# Altium PCB nguon-usb.pcbdoc
Units mm, origin at the board's own origin, x right, y up, seen from the top; angles counter-clockwise.
Board outline 78.61 x 100 mm, 2 copper layers (Top Layer, Bottom Layer); 10 components, 3 nets, 180 pads, 0 vias.
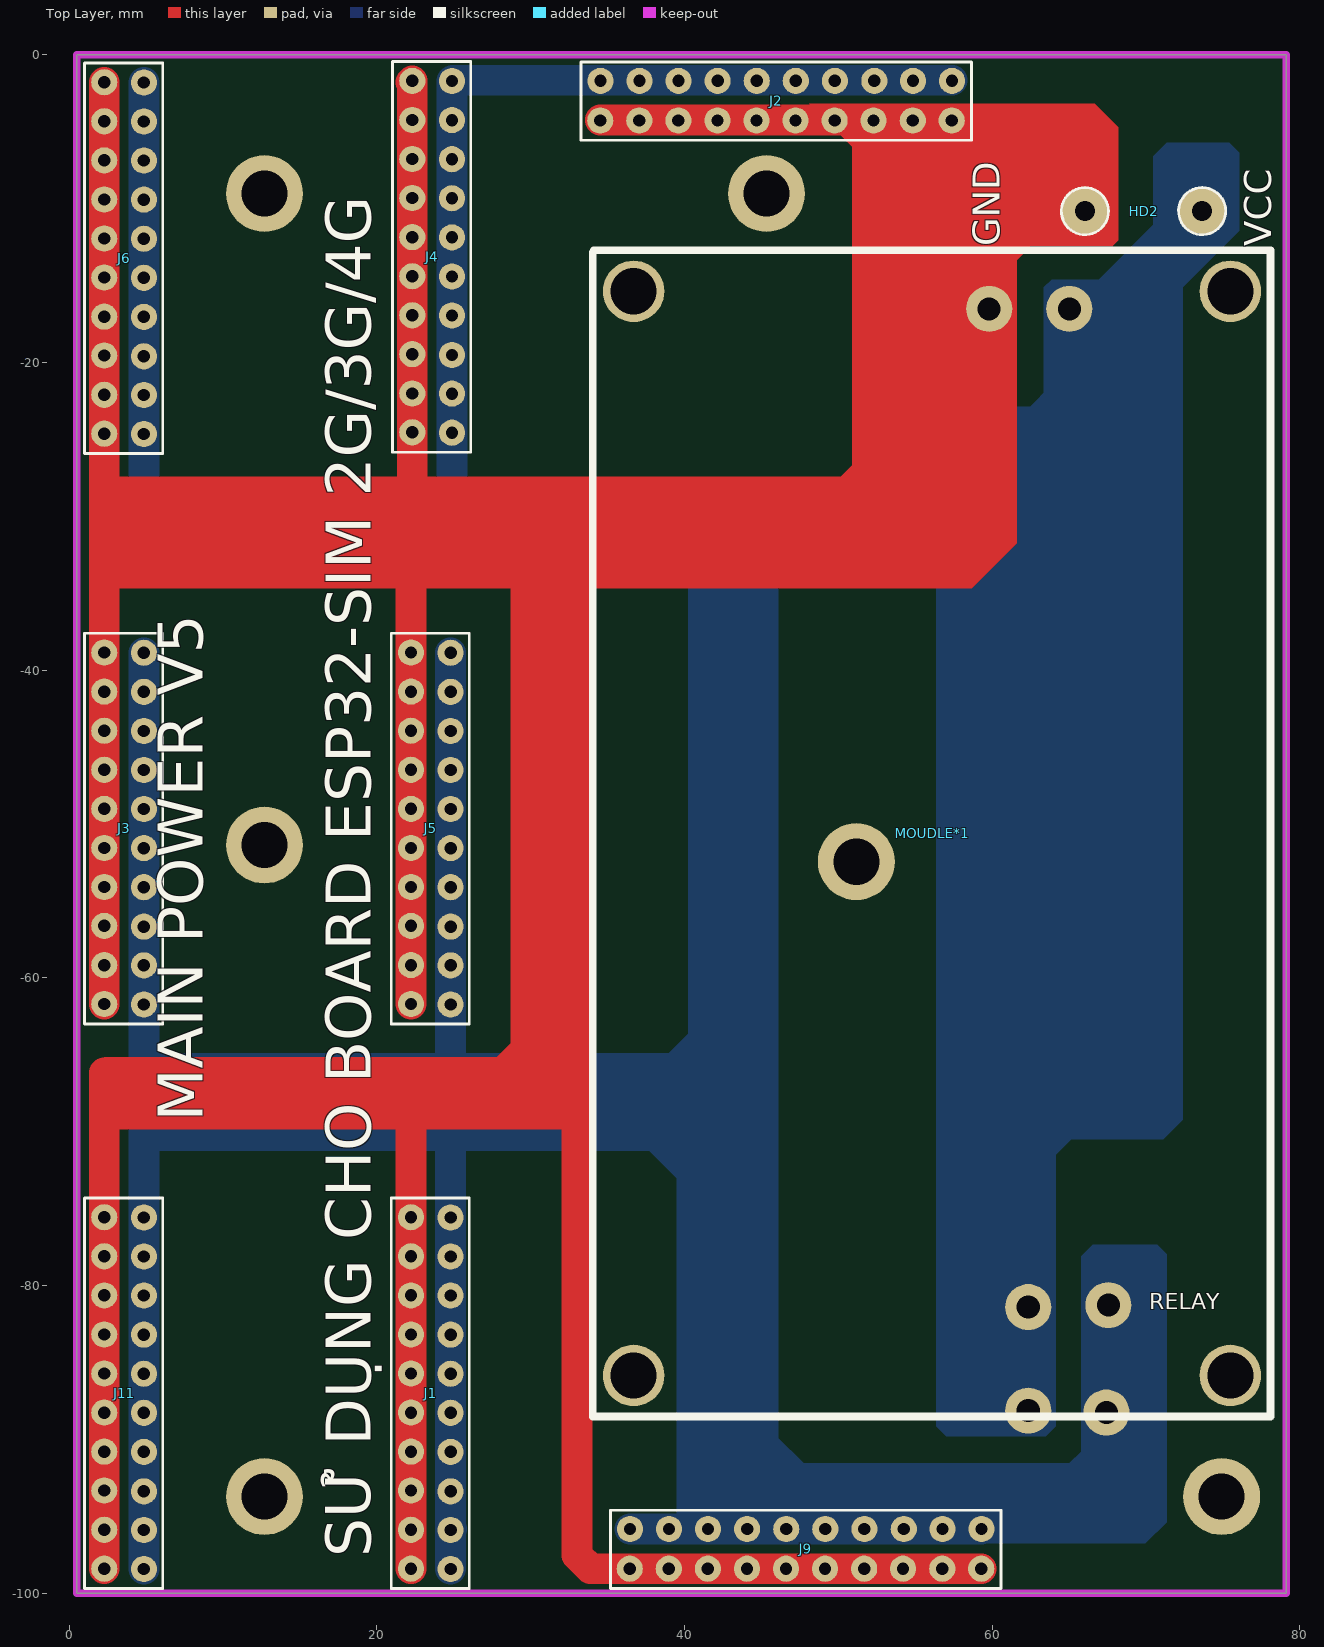
[diagram p0: Top Layer view]
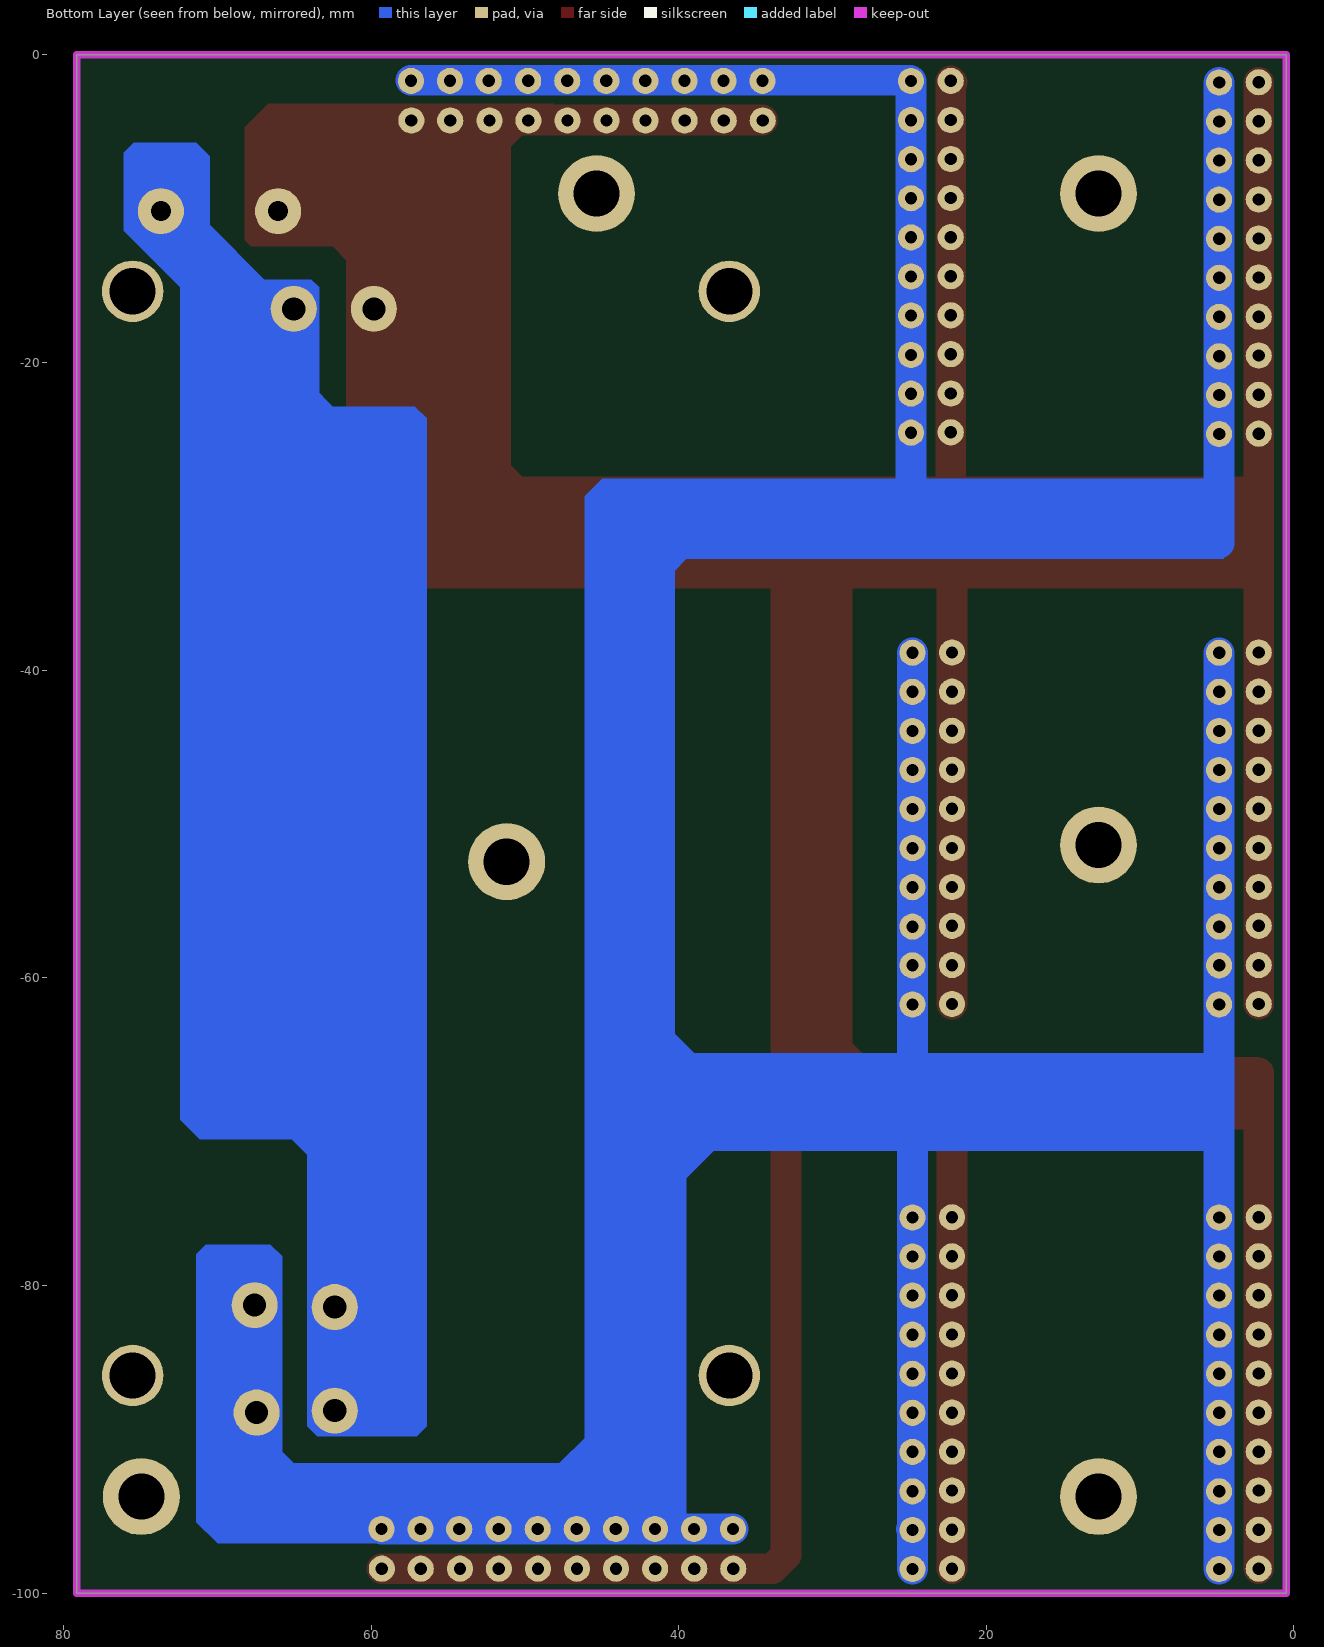
[diagram p1: Bottom Layer view, seen from below]

## Layer stack, top to bottom
Top Solder: solder mask 0.0102, Solder Resist, Dk 3.5
Top Layer: signal copper 0.0356
Dielectric 1: dielectric 0.32, FR-4, Dk 4.8
Bottom Layer: signal copper 0.0356
Bottom Solder: solder mask 0.0102, Solder Resist, Dk 3.5

## Board outline
0.508,-100 0.508,0 79.121,0 79.121,-100

## Design rules (kind name [scope] priority, off if disabled: settings)
Clearance [All] p1: gap=0.254 ignorepadtopadclearanceinfootprint=FALSE except(0: Arc-Hole Track-Hole SMDPad-Hole THPad-Hole Via-Hole Fill-Hole Poly-Hole Region-Hole Text-Hole)
PolygonConnect [All] p1: connectstyle=Relief reliefconductorwidth=0.254 reliefentries=4 polygonreliefangle="90 Angle" airgapwidth=0.254
RoutingVias [All] p1: holewidth=0.711 width=1.27 viastyle="Through Hole" minholewidth=0.711 minwidth=1.27 maxholewidth=0.711 maxwidth=1.27
SolderMaskExpansion [All] p1: expansion=0.102
Width [All] p1: maxlimit=4.5 minlimit=0.2 preferedwidth=2
30 further rules are at their usual default settings.

## Components (designator, comment, footprint, x,y, rotation, side; value= is the part's Value field where it differs from the comment)
HD2 "Header 2" "HED2 -C" 66.04,-10.16 r0 top
J1 "JP10x2" "JP10X2 - DUPLICATE" 24.765,-98.425 r90 top
J2 "JP10x2" "JP10X2 - DUPLICATE" 57.391,-1.727 r180 top
J3 "JP10x2" "JP10X2 - DUPLICATE" 4.826,-61.716 r90 top
J4 "JP10x2" "JP10X2 - DUPLICATE" 24.854,-24.549 r90 top
J5 "JP10x2" "JP10X2 - DUPLICATE" 24.765,-61.716 r90 top
J6 "JP10x2" "JP10X2 - DUPLICATE" 4.826,-24.638 r90 top
J9 "JP10x2" "JP10X2 - DUPLICATE" 59.309,-95.872 r180 top
J11 "JP10x2" "JP10X2 - DUPLICATE" 4.826,-98.425 r90 top
MOUDLE*1 "MODULE TIMER/RELAY" "MODULE TIMER/RELAY" 65.024,-16.51 r270 top

## Footprints (in the part's own frame and the unit in brackets; to place one, negate y for a bottom-side part, rotate by r counter-clockwise, add the part's x,y. Pads: shape width x height; smd on the part's side, far side on the other; paste and mask are expansions set on the pad)
"HED2 -C" [mm] "Header 2, 2 pin, hight 300mil, Pin to Pin 200, Colour Green"
  round 3 hole 1.3: 1(0,0) 2(7.62,0)
  silkscreen extent -1.53,-1.53 9.15,1.53, body extent -3.86,-1.63 11.38,10.37, height 12.4
"JP10X2 - DUPLICATE" [mm]
  round 1.7 hole 0.8: 1(-0.013,-0.038) 2(0.013,2.54) 3(2.527,-0.038) 4(2.54,2.54) 5(5.042,-0.038) 6(5.093,2.54) 7(7.607,-0.038) 8(7.62,2.54) 9(10.147,-0.038) 10(10.16,2.54) 11(12.687,-0.038) 12(12.7,2.54) 13(15.227,-0.038) 14(15.24,2.54) 15(17.767,-0.038) 16(17.78,2.54) 17(20.307,-0.038) 18(20.32,2.54) 19(22.847,-0.038) 20(22.86,2.54)
  silkscreen extent -1.28,-1.26 24.12,3.82
"MODULE TIMER/RELAY" [mm]
  round 4 hole 3: 0(-1.143,10.473) 0(-1.143,-28.321) 0(69.342,-28.321) 0(69.342,10.473)
  round 3 hole 1.5: COM(64.897,-2.667) GND(0,-5.207) IN+(0,0) NC(64.77,2.54)
  silkscreen extent -3.81,-30.99 72.01,13.08

## Part data
HD2: library part Hed2, "Header 2 (Green)"

## Free pads (board coordinates)
  round 1 on Top Solder: 3(64.364,-75.811) 4(64.287,-75.735)
  round 5 hole 3: 8(12.7,-93.726) 8(12.7,-51.371) 8(12.7,-9.017) 8(45.339,-9.017) 8(51.181,-52.451) 8(74.93,-93.726)
  round 3 hole 1.5: 9(62.357,-88.138) 9(67.437,-88.265)

## Nets (pads, with @x,y where several pads share a name; then routed paths per layer and width w, separated by ;. In a path a pad name is that pad's centre, name@x,y a point inside that pad or via, vN(x,y) a via of type N, cw(c..) or ccw(c..) an arc to the next point about the centre after c; other vN are vias at no path point)
6.5V: J1.1 J1.3 J1.5 J1.7 J1.9 J1.11 J1.13 J1.15 J1.17 J1.19 J2.1 J2.3 J2.5 J2.7 J2.9 J2.11 J2.13 J2.15 J2.17 J2.19 J3.1 J3.3 J3.5 J3.7 J3.9 J3.11 J3.13 J3.15 J3.17 J3.19 J4.1 J4.3 J4.5 J4.7 J4.9 J4.11 J4.13 J4.15 J4.17 J4.19 J5.1 J5.3 J5.5 J5.7 J5.9 J5.11 J5.13 J5.15 J5.17 J5.19 J6.1 J6.3 J6.5 J6.7 J6.9 J6.11 J6.13 J6.15 J6.17 J6.19 J9.1 J9.3 J9.5 J9.7 J9.9 J9.11 J9.13 J9.15 J9.17 J9.19 J11.1 J11.3 J11.5 J11.7 J11.9 J11.11 J11.13 J11.15 J11.17 J11.19 MOUDLE*1.NC pad.9@67.437,-88.265 | length 231.1
  Bottom Layer w2: J11.1 J11.3 J11.5 J11.7 J11.9 J11.11 J11.13 J11.15 J11.17 J11.19 J3.1 J3.3 J3.5 J3.7 J3.9 J3.11 J3.13 J3.15 J3.17 J3.19 ; 4.864,-31.75 J6.1 J6.3 J6.5 J6.7 J6.9 J6.11 J6.13 J6.15 J6.17 J6.19 ; J1.1 J1.3 ; J5.19 J5.17 J5.15 J5.13 J5.11 J5.9 J5.7 J5.5 J5.3 J5.1 J1.19 J1.17 J1.15 J1.13 J1.11 J1.9 J1.7 J1.5 J1.3 ; J1.3@24.867,-95.834 J1.3 ; 24.892,-28.194 J4.1 J4.3 J4.5 J4.7 J4.9 J4.11 J4.13 J4.15 J4.17 J4.19 24.943,-1.651 37.973,-1.651 40.513,-1.651 42.164,-1.651 45.593,-1.651 47.244,-1.651 53.238,-1.651 J2.1@57.404,-1.651 ; J9.19 J9.17 J9.15 J9.13 J9.11 J9.9 J9.7 J9.5 J9.3 J9.1
GND: HD2.1 J1.2 J1.4 J1.6 J1.8 J1.10 J1.12 J1.14 J1.16 J1.18 J1.20 J2.2 J2.4 J2.6 J2.8 J2.10 J2.12 J2.14 J2.16 J2.18 J2.20 J3.2 J3.4 J3.6 J3.8 J3.10 J3.12 J3.14 J3.16 J3.18 J3.20 J4.2 J4.4 J4.6 J4.8 J4.10 J4.12 J4.14 J4.16 J4.18 J4.20 J5.2 J5.4 J5.6 J5.8 J5.10 J5.12 J5.14 J5.16 J5.18 J5.20 J6.2 J6.4 J6.6 J6.8 J6.10 J6.12 J6.14 J6.16 J6.18 J6.20 J9.2 J9.4 J9.6 J9.8 J9.10 J9.12 J9.14 J9.16 J9.18 J9.20 J11.2 J11.4 J11.6 J11.8 J11.10 J11.12 J11.14 J11.16 J11.18 J11.20 MOUDLE*1.GND | length 295.2
  Top Layer w2: J11.2 J11.4 J11.6 J11.8 J11.10 J11.12 J11.14 J11.16 J11.18 J11.20 2.286,-66.167 ; J3.2 J3.4 J3.6 J3.8 J3.10 J3.12 J3.14 J3.16 J3.18 J3.20 J6.2 J6.4 J6.6 J6.8 J6.10 J6.12 J6.14 J6.16 J6.18 J6.20 ; J1.2 J1.4 J1.6 J1.8 J1.10 J1.12 J1.14 J1.16 J1.18 J1.20 22.225,-67.437 ; J5.2 J5.4 J5.6 J5.8 J5.10 J5.12 J5.14 J5.16 J5.18 J5.20 22.225,-32.639 ; J4.20@22.225,-1.778 J4.20 J4.18 J4.16 J4.14 J4.12 J4.10 J4.8 J4.6 J4.4 J4.2 22.314,-29.045 ; 31.623,-33.02 33.02,-34.417 33.02,-97.536 33.896,-98.412 J9.20 J9.18 J9.16 J9.14 J9.12 J9.10 J9.8 J9.6 J9.4 J9.2 ; J2.20@34.531,-4.229 40.5,-4.229 44.691,-4.229 53.188,-4.229 55.74,-4.229 58.268,-4.229
VIN: HD2.2 MOUDLE*1.COM MOUDLE*1.IN+ pad.9@62.357,-88.138
pads on no net: MOUDLE*1.0

## Keep-outs
Keep-Out Layer:
  the board outline again, w0.5

## Other copper
Top Layer:
  region net GND: 2.286,-69.85 32.385,-69.85 33.909,-68.326 33.909,-32.639 33.782,-32.766 28.702,-32.766 28.702,-64.262 27.813,-65.151 2.286,-65.151
  region net GND: 68.199,-4.699 68.199,-12.065 67.818,-12.446 62.484,-12.446 61.595,-13.335 61.595,-31.75 58.674,-34.671 2.159,-34.671 2.159,-27.686 1.905,-27.432 50.165,-27.432 50.927,-26.67 50.927,-5.969 48.133,-3.175 66.675,-3.175
Bottom Layer:
  region net 6.5V: 46.101,-67.437 46.101,-28.702 44.958,-27.559 4.699,-27.559 4.572,-27.686 4.572,-32.766 39.497,-32.766 40.259,-33.528 40.259,-63.627 38.1,-65.786
  region: 46.101,-66.421
  region net 6.5V: 45.847,-89.662 47.879,-91.694 47.879,-92.329 44.577,-92.329 44.45,-92.456
  region net 6.5V: 5.207,-71.247 37.719,-71.247 39.497,-73.025 39.497,-95.377 40.894,-96.774 69.977,-96.774 71.374,-95.377 71.374,-77.978 70.739,-77.343 66.548,-77.343 65.786,-78.105 65.786,-90.805 65.024,-91.567 46.101,-91.567 46.101,-66.98 44.018,-64.897 4.699,-64.897
  region net VIN: 64.135,-89.154 63.5,-89.789 57.023,-89.789 56.388,-89.154 56.388,-23.622 57.15,-22.86 62.484,-22.86 63.754,-21.59 69.215,-21.59 72.39,-24.765 72.39,-69.215 71.12,-70.485 65.151,-70.485 64.135,-71.501
  region net VIN: 76.073,-6.35 75.438,-5.715 71.374,-5.715 70.485,-6.604 70.485,-11.049 66.929,-14.605 63.881,-14.605 63.373,-15.113 63.373,-25.146 64.135,-25.908 71.755,-25.908 72.39,-25.273 72.39,-15.113 76.073,-11.43
  region: 12.065,-4.953
  region: 66.421,-74.168

## Silkscreen, mask and mechanical layers (free items; w line width, h text height)
Top Overlay:
  text "GND" at 61.087,-12.446 h3 r90
  text "VCC" at 78.74,-12.446 h3 r90
  text "MAIN POWER V5" at 9.652,-69.342 h5 r90
  text "RELAY" at 70.231,-81.915 h1.8
  text "SỬ DỤNG CHO BOARD ESP32-SIM 2G/3G/4G" at 20.574,-97.663 h5 r90
Mechanical 15:
  lines w0.25: 55.372,-68.683 75.208,-68.683 ; 57.912,-78.359 57.912,-64.389 ; 62.865,-78.867 62.865,-64.643 ; 67.945,-78.359 67.945,-63.119